# Altium PCB New BuckPCB.PcbDoc
Units mil, origin at the board's own origin, x right, y up, seen from the top; angles counter-clockwise.
Board outline 1785 x 1885 mil, 2 copper layers (Top Layer, Bottom Layer); 13 components, 7 nets, 30 pads, 1 vias.
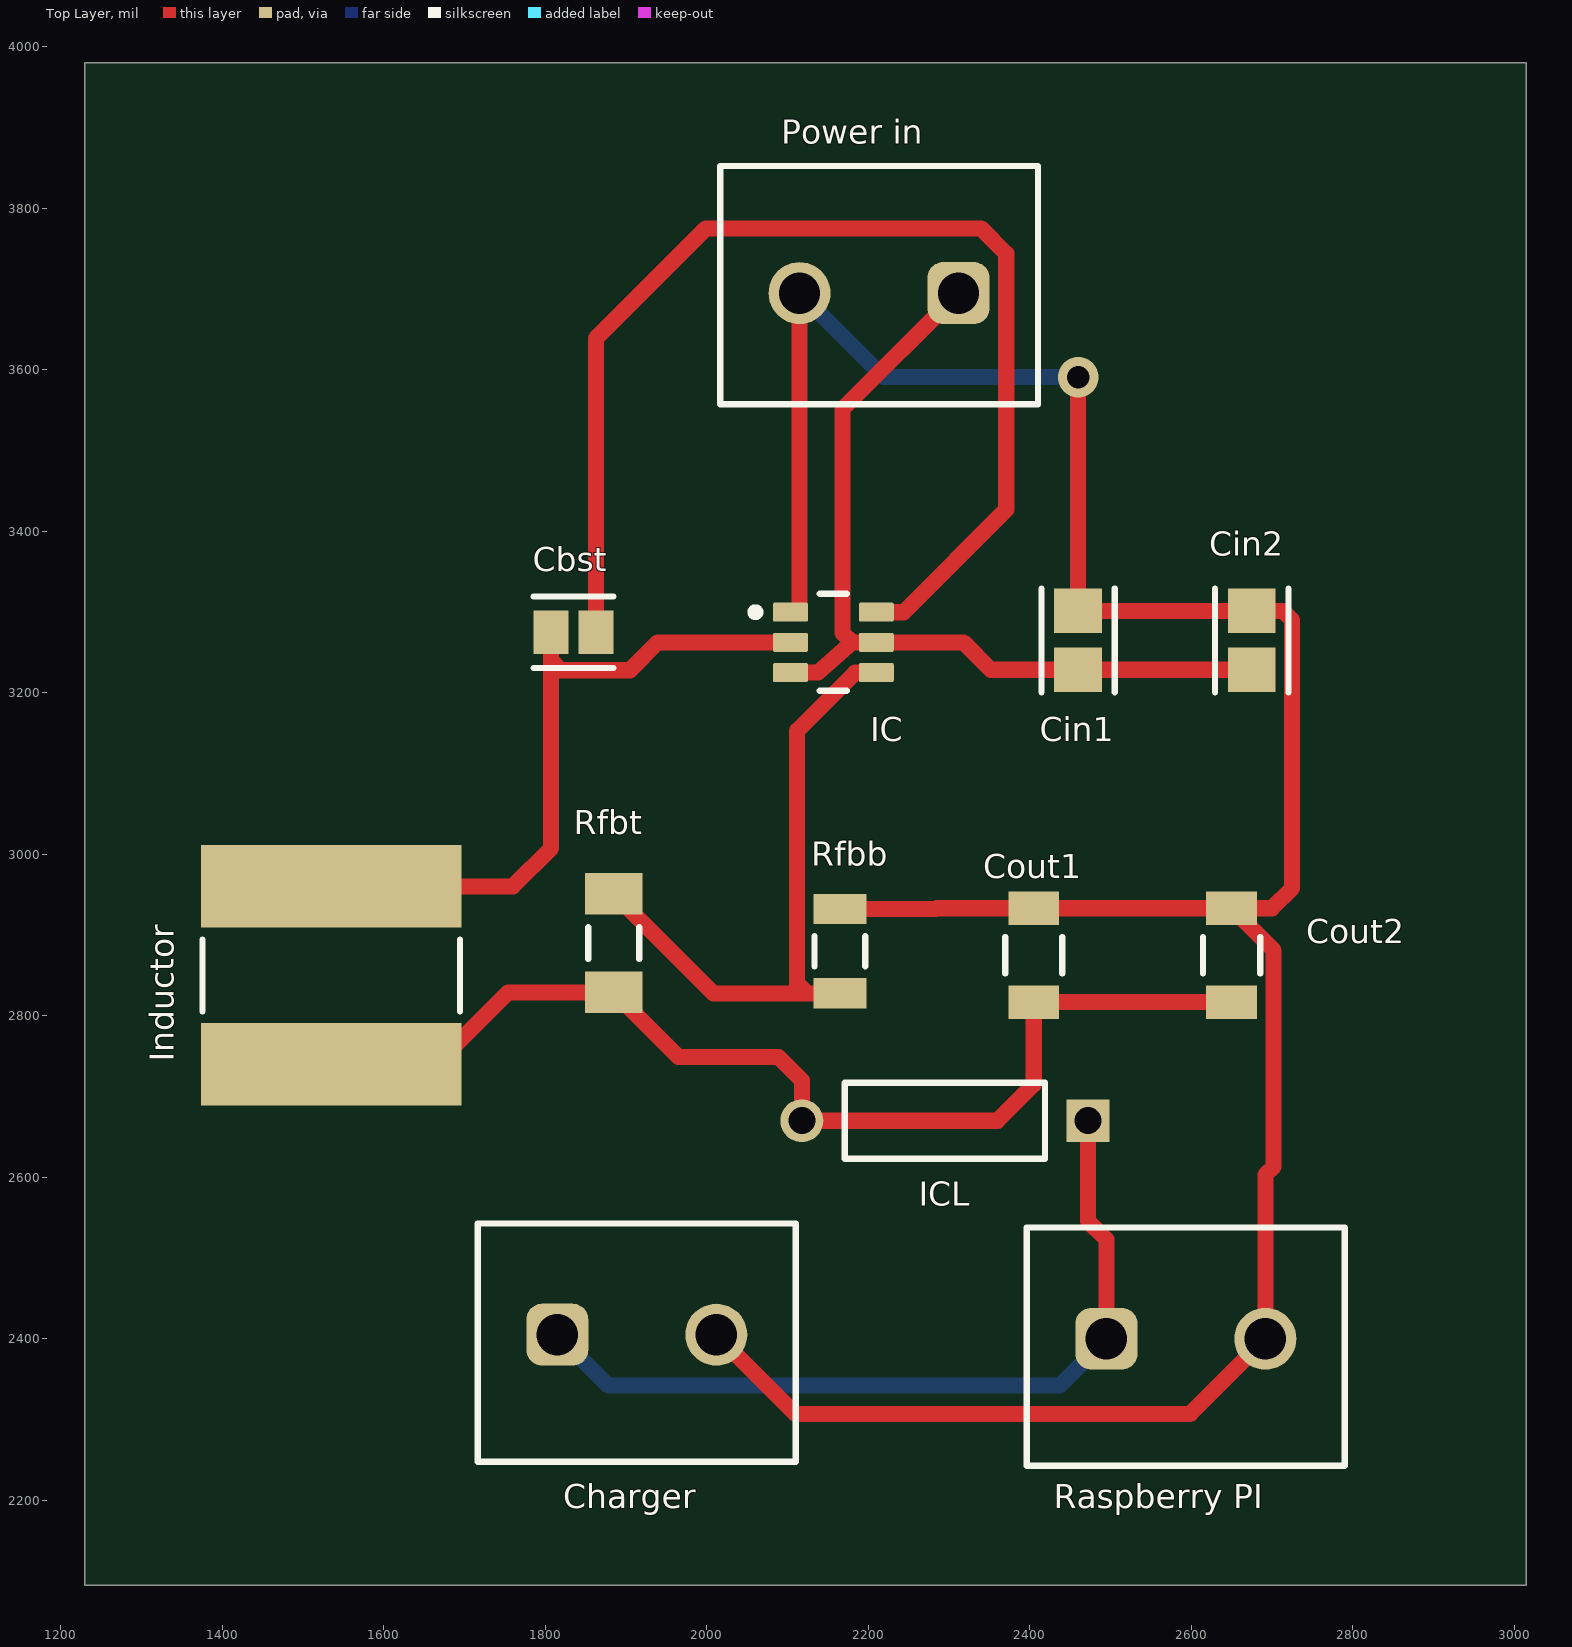
[diagram p0: Top Layer view]
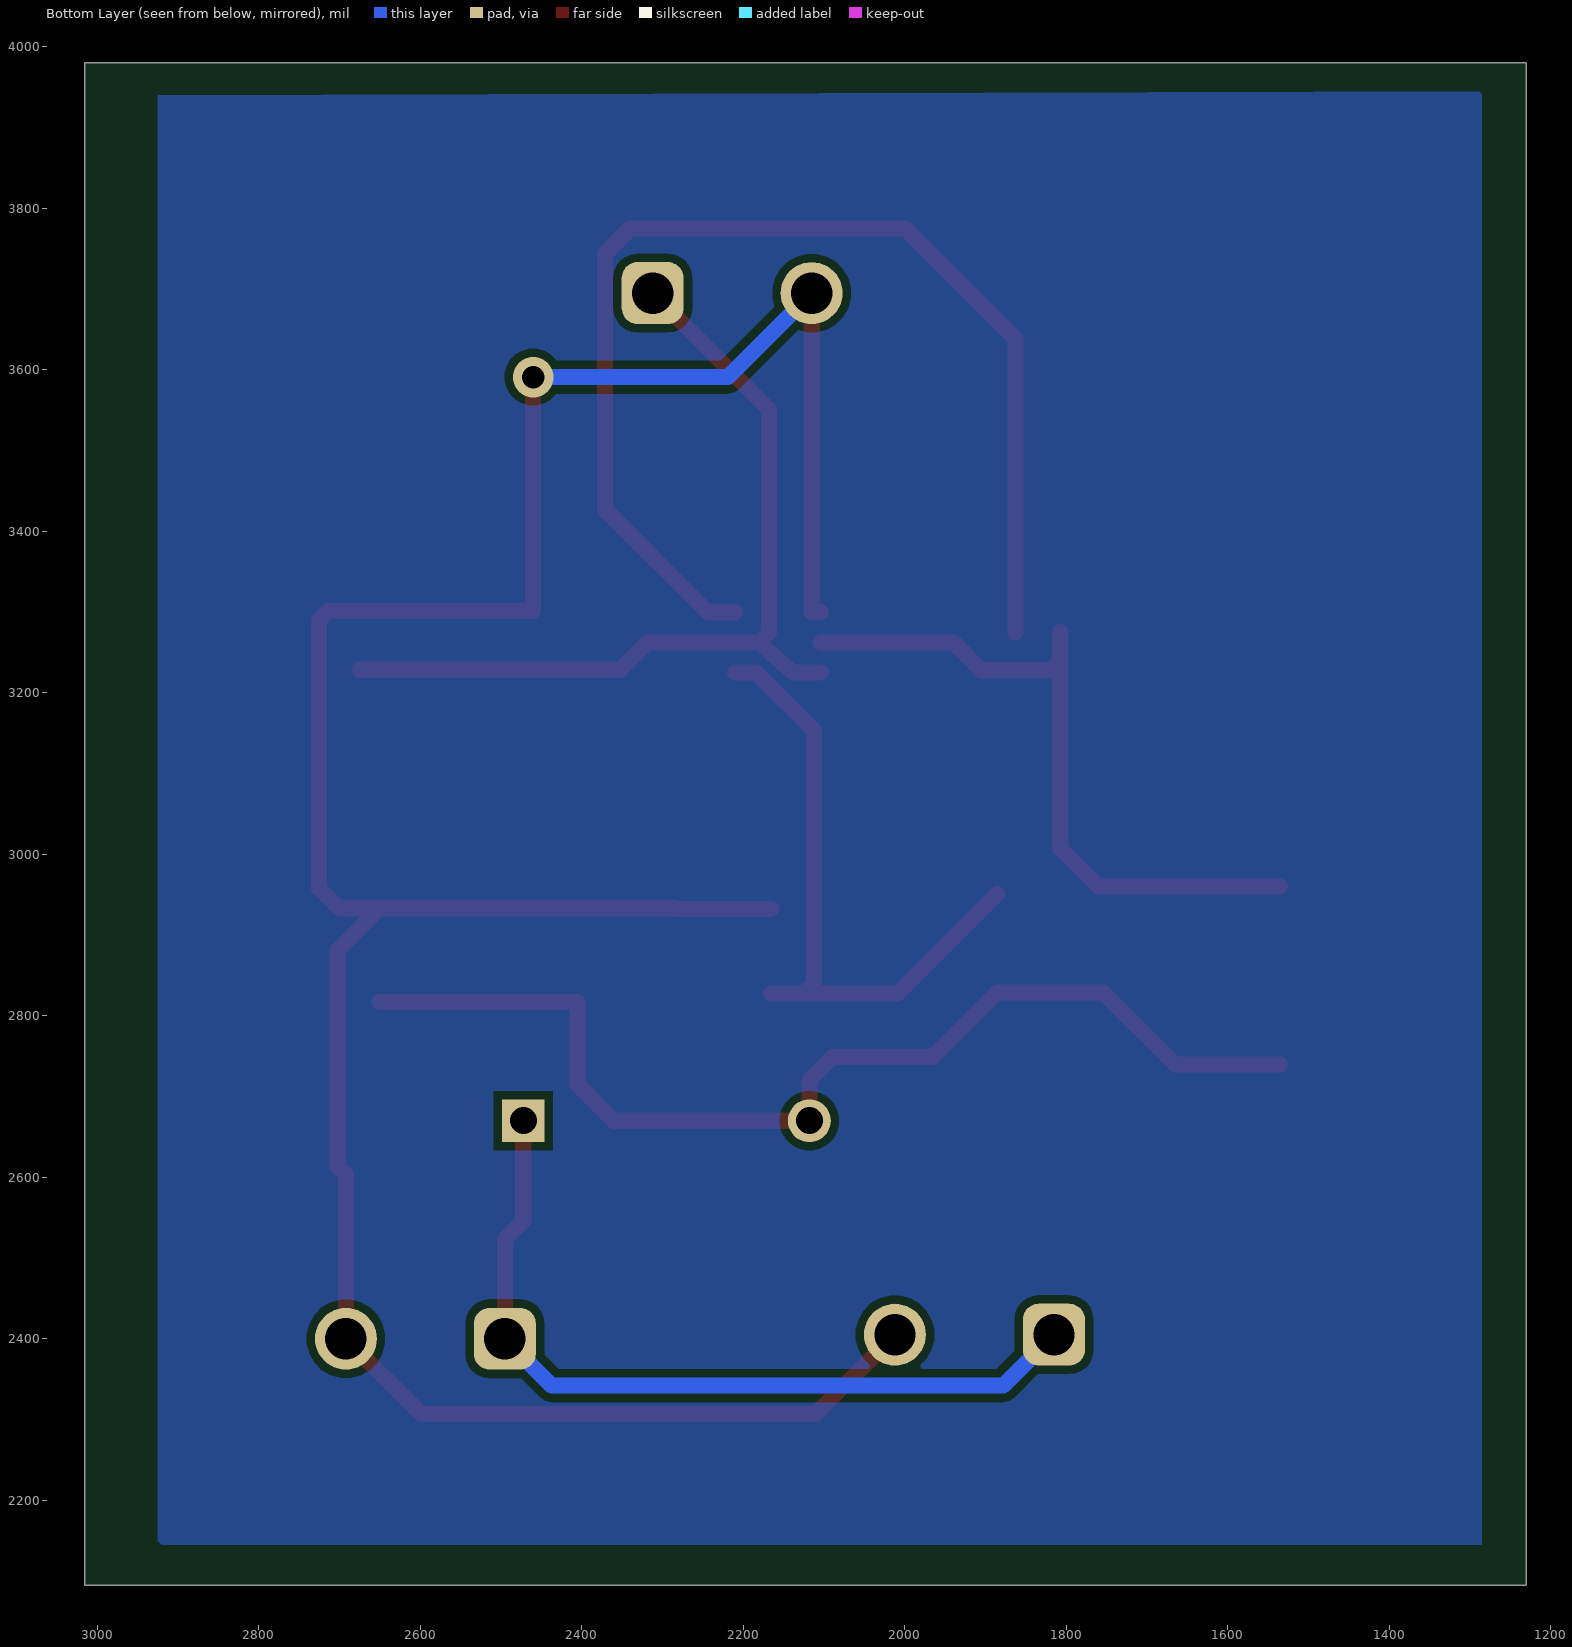
[diagram p1: Bottom Layer view, seen from below]
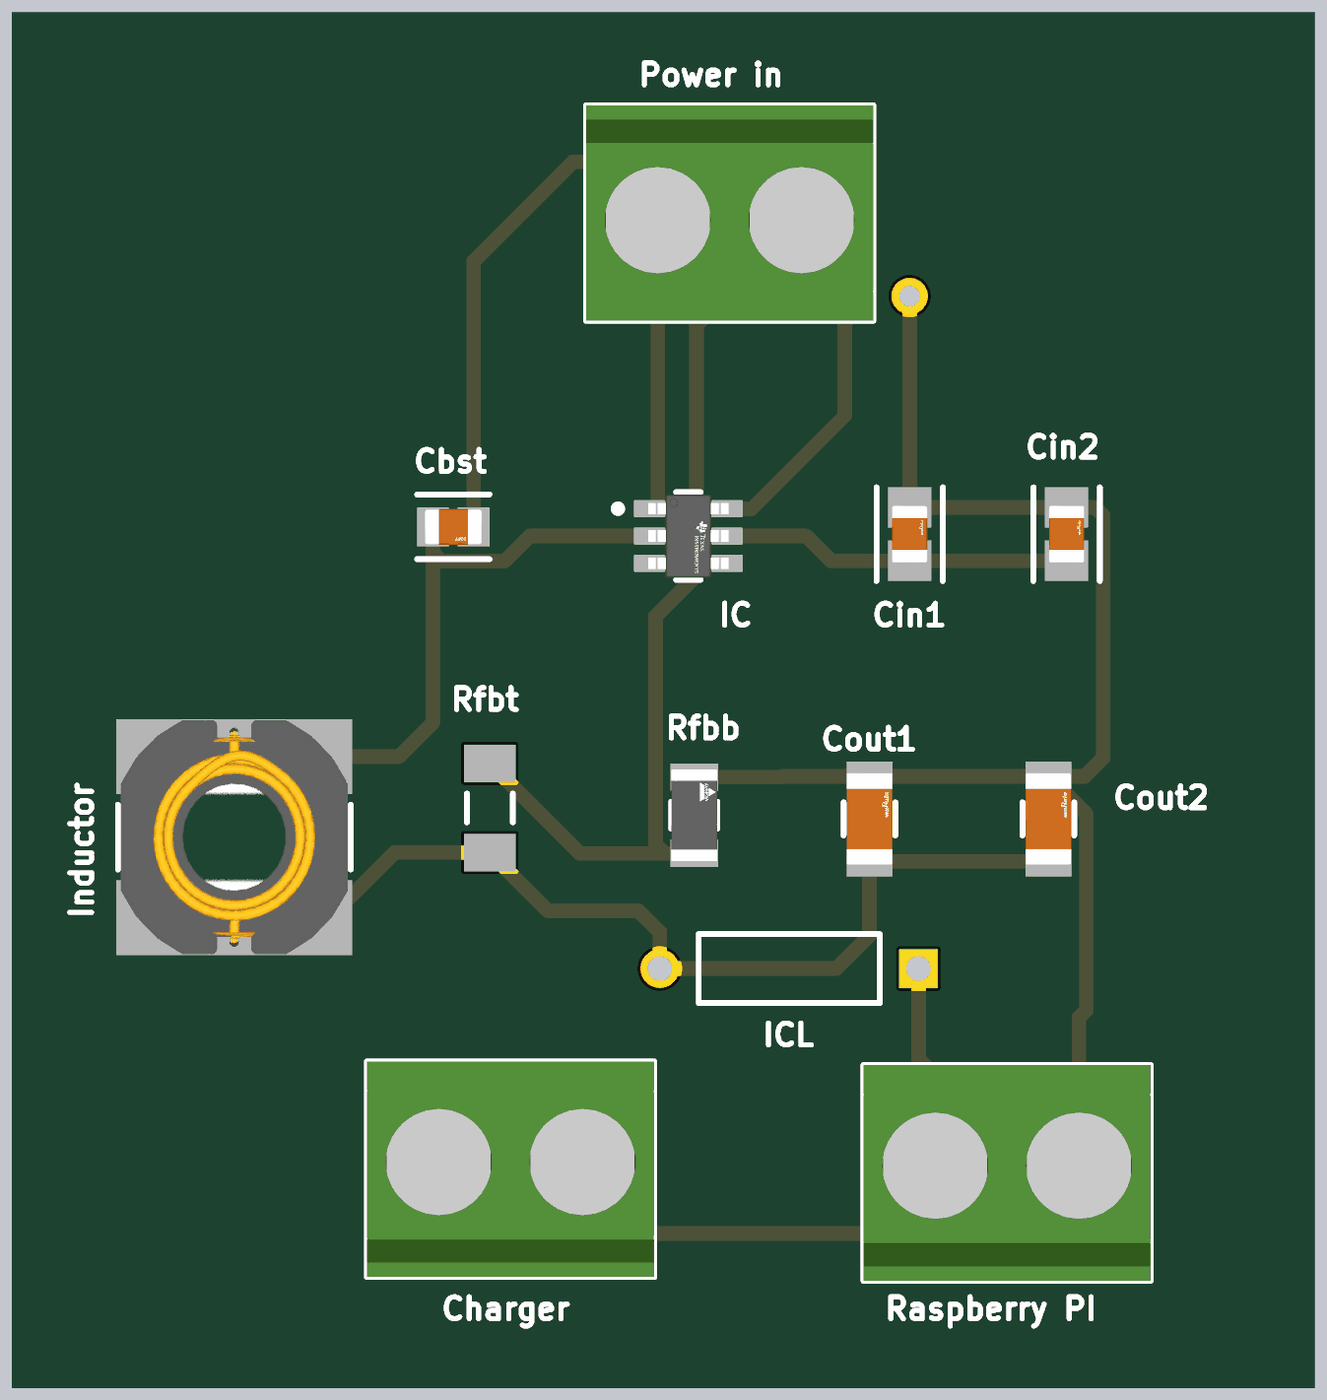
[diagram p2: 3D render of the assembled board from above, using the file's embedded part models]

## Layer stack, top to bottom
Top Solder: solder mask 0.4, Solder Resist, Dk 3.5
Top Layer: signal copper 1.4
Dielectric 1: dielectric 12.6, FR-4, Dk 4.8
Bottom Layer: signal copper 1.4
Bottom Solder: solder mask 0.4, Solder Resist, Dk 3.5

## Board outline
1230,2095 3015,2095 3015,3980 1230,3980

## Design rules (kind name [scope] priority, off if disabled: settings)
Clearance [All] p1: gap=10 ignorepadtopadclearanceinfootprint=FALSE
PolygonConnect [All] p1: connectstyle=Relief reliefconductorwidth=10 reliefentries=4 polygonreliefangle="90 Angle" airgapwidth=10
RoutingVias [All] p1: holewidth=28 width=50 viastyle="Through Hole" minholewidth=28 minwidth=50 maxholewidth=28 maxwidth=50
SolderMaskExpansion [All] p1: expansion=4 istentingtop=FALSE
SupplyNets "Schematic Supply Nets" [InNet('GND')] p1: voltage=0.000
Width [All] p1: maxlimit=50 minlimit=10 preferedwidth=20
30 further rules are at their usual default settings.

## Components (designator, comment, footprint, x,y, rotation, side; value= is the part's Value field where it differs from the comment)
Cbst "08053C104KAT2A" FP-0805-L_2_01_0_2-W_1_25-IPC_C 1835,3275 r0 top
Charger "691137710002" 691137710002 2593.43,2390.16 r0 top
Cin1 "GRM21BR61E106MA73L" FP-GRM21B-0_15-IPC_A 2460,3265 r90 top
Cin2 "GRM21BR61E106MA73L" FP-GRM21B-0_15-IPC_A 2675,3265 r90 top
Cout1 "GRM31CR71A226KE15L" FP-GRM31C-0_2-e0_3_0_8-MFG 2405,2875 r90 top
Cout2 "GRM31CR71A226KE15L" FP-GRM31C-0_2-e0_3_0_8-MFG 2650,2875 r90 top
IC "TPS563200DDCR" FP-DDC0006A-MFG 2156.85,3262.4 r0 top (schematic designator U?)
ICL "MFR-25FBF5210K" RESA60-630X240 2295,2670 r180 top
Inductor "SRN8040-3R3Y" FP-SRN8040-MFG 1535,2850 r270 top
"Power in" "691137710002" 691137710002 2213.43,3704.84 r180 top
"Raspberry PI" "691137710002" 691137710002 1913.43,2395.16 r0 top
Rfbb "CRCW120610K0FKEA" FP-CRCW1206-e3-IPC_C 2165,2880 r90 top
Rfbt "CRCW120656K2FKEA" RESC3216X60X45ML10T20 1885,2890 r90 top

## Footprints (in the part's own frame and the unit in brackets; to place one, negate y for a bottom-side part, rotate by r counter-clockwise, add the part's x,y. Pads: shape width x height; smd on the part's side, far side on the other; paste and mask are expansions set on the pad)
691137710002 [mm] "Horizontal Cable Entry with Pressure Clamp, pitch 5mm, 02p"
  rrect50% 1.95x1.95 hole 1.3: 1(-2.5,0.25)
  round 1.95 hole 1.3: 2(2.5,0.25)
  silkscreen extent -5,-3.75 5,3.75, body extent -5,-3.75 5,3.75, height 11.6
FP-0805-L_2_01_0_2-W_1_25-IPC_C [mil]
  rect 43.49x53.39 smd paste+0 mask+0: 1(-27.79,0) 2(27.79,0)
  silkscreen extent -50,-44 50,44, body extent -53,-32 53,32, height 10
FP-CRCW1206-e3-IPC_C [mil]
  rect 37.64x65.28 smd paste+0 mask+0: 1(-52.21,0) 2(52.21,0)
  silkscreen extent -19,-31 19,31, body extent -75,-38 75,38, height 10
FP-DDC0006A-MFG [mm]
  rrect17% 1.1x0.6 smd paste+0 mask+0: 1(-1.35,0.95) 2(-1.35,0) 3(-1.35,-0.95) 4(1.35,-0.95) 5(1.35,0) 6(1.35,0.95)
  silkscreen extent -2.57,-1.53 0.42,1.53, body extent -2,-1.63 2,1.63, height 0.25
FP-GRM21B-0_15-IPC_A [mil]
  rect 55.34x59.38 smd paste+0 mask+0: 1(-36.47,0) 2(36.47,0)
  silkscreen extent -64,-45 64,45, body extent -84,-49 84,49, height 10
FP-GRM31C-0_2-e0_3_0_8-MFG [mm]
  rect 1.05x1.6 smd paste+0 mask+0: 1(-1.475,0) 2(1.475,0)
  silkscreen extent -0.58,-0.9 0.58,0.9, body extent -2.1,-1 2.1,1, height 0.25
FP-SRN8040-MFG [mm]
  rect 2.6x8.2 smd paste+0 mask+0: 1(-2.8,0) 2(2.8,0)
  silkscreen extent -1.13,-4.05 1.13,4.05, body extent -4.27,-4.2 4.27,4.2, height 0.25
RESA60-630X240 [mm] "Axial Resistor, 2-Leads, Dia 2.4mm, Body Length 6.3mm"
  rect 1.35x1.35 hole 0.85: 1(-4.5,0)
  round 1.35 hole 0.85: 2(4.5,0)
  silkscreen extent -3.15,-1.2 3.15,1.2, body extent -3.15,-1.2 3.15,1.2, height 2.4
RESC3216X60X45ML10T20 [mm] "Chip Resistor, 2-Leads, Body 3.20x1.60mm, IPC Low Density"
  rect 1.3x1.8 smd: 1(-1.55,0) 2(1.55,0)
  silkscreen extent -0.5,-0.8 0.5,0.8, body extent -1.65,-0.85 1.65,0.85, height 0.6

## Part data
Cbst: library part CMP-2000-05014-2, "General Purpose Ceramic Capacitor, 0805, 100nF, 10%, X7R, 0.15, 25V", Capacitance=100nF, Case Code (Imperial)=0805, Case Code (Metric)=2012, Dielectric=X7R, Insulation Resistance=100GR, Max Operating Temperature=125°C, Min Operating Temperature=-55°C, Package Quantity=1, Tolerance=10%, Voltage=25V, Case/Package=0805, Construction=Flat, Contact Plating=Tin, Depth=1.25mm, Dissipation Factor=3%, Height=0.94mm, Lead Free="Lead Free", Length=2.01mm, Mount="Surface Mount", Number of Pins=2, Packaging="Tape and Reel", Radiation Hardening=No, REACH SVHC="No SVHC", RoHS Compliant=Yes, Series=-, Termination=SMD/SMT, Thickness=0.037inch, Voltage Rating=25V, Voltage Rating (DC)=25V, Width=0.049inch
Charger "Power in" "Raspberry PI": library part CMP-1502-03324-2, Current Rating=16A, Max Operating Temperature=120°C, Min Operating Temperature=-30°C, Voltage Rating=300V, Contact Material="Nickel, Tin", Height=11.6mm, Lead Pitch=5mm, NexarPartId=78871135, Number of Contacts=2, Number of Pins=2, Number of Rows=1, Packaging=Box, RoHS=Non-Compliant
Cin1 Cin2: library part CMP-06035-013048-1, "Chip Multilayer Ceramic Capacitors for General Purpose, 0805, 10uF, X5R, 15%, 20%, 25V", Capacitance=10uF, Case Code (Imperial)=0805, Case Code (Metric)=2012, Dielectric=X5R, Max Operating Temperature=85°C, Min Operating Temperature=-55°C, Package Quantity=3000, Resistor Type=Ceramic, Tolerance=20%, Voltage Rating=25V, Case/Package=0805, Depth=1.25mm, Height=1.25mm, Lead Free="Lead Free", Length=2mm, Mount="Surface Mount", Packaging="Tape and Reel", REACH SVHC="No SVHC", Termination=SMD/SMT, Thickness=0.055inch, Voltage Rating (DC)=25V, Weight=0.000335oz, Width=0.049inch
Cout1 Cout2: library part CMP-06035-003841-1, "Chip Multilayer Ceramic Capacitors for General Purpose, 1206, 22uF, X7R, 15%, 10%, 10V", Capacitance=22uF, Case Code (Imperial)=1206, Case Code (Metric)=3216, Dielectric=X7R, Max Operating Temperature=125°C, Min Operating Temperature=-55°C, Package Quantity=1, Tolerance=10%, Voltage=10V, Case/Package=1206, Depth=1.6mm, Height=1.6mm, Lead Free="Lead Free", Length=3.2mm, Material=Ceramic, Mount="Surface Mount", Packaging="Tape and Reel", Radiation Hardening=No, REACH SVHC="No SVHC", Termination=SMD/SMT, Thickness=0.071inch, Voltage Rating=10V, Voltage Rating (DC)=10V, Width=0.063inch
IC: library part CMP-04918-000155-1, "IC REG BUCK ADJ 3A TSOT23-6", Case/Package=SOT-23-6, Max Input Voltage=17V, Max Operating Temperature=125°C, Max Output Current=3A, Max Output Voltage=7V, Min Input Voltage=4.5V, Min Operating Temperature=-40°C, Min Output Voltage=760mV, Quiescent Current=190uA, Switching Frequency=650kHz, Contact Plating=Tin, Lead Free="Lead Free", Mount="Surface Mount", Number of Outputs=1, Operating Supply Voltage=17V, Output Configuration=Positive, Output Current=3A, Output Type=Adjustable, Output Voltage=7V, Packaging="Tape and Reel", Radiation Hardening=No, Synchronous Rectifier=Yes
ICL: library part CMP-1659-00074-2, "Axial Resistor, 10 KOhm, +/- 1%, 0.25 W, -55 to 155 degC, 2-Pin THD, RoHS, Bulk", Case\/Package=Axial, Manufacturer=Yageo, Max Operating Temperature=155degC, Max Power Dissipation=250mW, Min Operating Temperature=-55degC, Package Description="2-Pin Axial Lead, Dia 2.4 mm, Body Length 6.3 mm", Package Quantity=200, Package Reference=MFR-25, Resistance=10KOhm, Temperature Coefficient=100ppm\/degreesC, Tolerance=1%, Voltage Rating=250V, Voltage Rating (DC)=200V, Composition=MetalFilm, Datasheet URL=http://www.yageo.com/documents/recent/Yageo%20LR_MFR_2013.pdf, Datasheet Version=04/2013, Lead Free=LeadFree, Length=0.248inch, Manufacturer URL=http://www.yageo.com/, Military Standard=Not, Mount=ThroughHole, Mounting Technology=ThroughHole, Number of Terminations=2, Packaging=Bulk, Power Rating=250mW, RoHSCompliant=True, Termination=Axial
Inductor: library part CMP-07248-000074-1, "FIXED IND 3.3UH 5.6A 21 MOHM SMD", Case/Package=Nonstandard, Current Rating=5.6A, DC Resistance (DCR)=21mR, Inductance=3.3uH, Inductance Tolerance=30%, Max Operating Temperature=125°C, Min Operating Temperature=-40°C, Package Quantity=1000, Resistor Type=Wirewound, Saturation Current=5.5A, Self Resonant Frequency=34MHz, Test Frequency=100kHz, Core Material=Ferrite, DC Current=5.6A, Depth=8.3mm, Height=4mm, Height - Seated (Max)=0.157inch, Length=8mm, Material=Steel, Max DC Current=5.6A, Military Standard=Not, Mount="Surface Mount", Number of Pins=2, Packaging="Tape and Reel", REACH SVHC="No SVHC", RMS Current (Irms)=5.6A, RoHS Compliant=Yes, Sample Rate (Hz)=100kHz, Series=SRN8040, Shielding=Shielded, Termination=SMD/SMT, Tolerance=30%, Width=8mm
Rfbb: library part CMP-2003-04807-2, "RES Thick Film, 10kΩ, 1%, 0.25W, 100ppm/°C, 1206", Case Code (Imperial)=1206, Case Code (Metric)=3216, Max Operating Temperature=155°C, Max Power Dissipation=250mW, Min Operating Temperature=-55°C, Package Quantity=10, Resistance=10kR, Temperature Coefficient=100ppm/°C, Tolerance=1%, Voltage Rating=200V, Case/Package=1206, Composition="Thick Film", Contact Plating=Tin, Depth=1.6mm, Features="Automotive AEC-Q200", Height=0.55mm, Lead Free="Lead Free", Length=3.2mm, Military Standard=Not, Number of Pins=2, Number of Terminations=2, Packaging="Tape and Reel", Power Rating=250mW, Radiation Hardening=No, Termination=SMD/SMT, Voltage Rating (DC)=200V, Weight=0.000353oz, Width=0.063inch, Working Voltage=200V
Rfbt: library part CMP-2003-02284-1, Manufacturer="Vishay Dale", Part Number=CRCW120656K2FKEA

## Via types
v1: diameter 50, hole 28, Top Layer to Bottom Layer, 1 vias

## Nets (pads, with @x,y where several pads share a name; then routed paths per layer and width w, separated by ;. In a path a pad name is that pad's centre, name@x,y a point inside that pad or via, vN(x,y) a via of type N, cw(c..) or ccw(c..) an arc to the next point about the centre after c; other vN are vias at no path point)
GND: "Power in.2" "Raspberry PI.2" Charger.2 Cin1.2 Cin2.2 Cout1.2 Cout2.2 IC.1 Rfbb.2 | length 3574.4
  Top Layer w20: 2011.85,2405 2109.85,2307 2598.85,2307 Charger.2 2691.85,2602.85 2702,2613 2702,2881.07 Cout2.2 ; IC.1 2115,3299.8 2115,3695 ; Rfbb.2 2284,2932.21 2284.86,2933.07 Cout1.2 Cout2.2 ; v1(2460,3591) Cin1.2 Cin2.2 2713.53,3301.47 2725,3290 2725,2958.07 2700,2933.07 Cout2.2
  Bottom Layer w20: 2115,3695 2219,3591 v1(2460,3591)
NetCbst_1: Cbst.1 IC.2 Inductor.1 | length 875
  Top Layer w20: Inductor.1 1760,2960.24 1807.21,3007.45 1807.21,3240 ; Cbst.1 1807.21,3240 ; IC.2 1939.4,3262.4 1905,3228 1819.21,3228 1807.21,3240
NetCbst_2: Cbst.2 IC.6 | length 1471.9
  Top Layer w20: Cbst.2 1862.79,3638.79 1999,3775 2340,3775 2371,3744 2371,3427 2243.8,3299.8 IC.6
NetCin1_1: "Power in.1" Cin1.1 Cin2.1 IC.3 IC.5 | length 1096.7
  Top Layer w20: IC.3 2138,3225 2180,3262.4 ; 2311.85,3695 2168,3551.15 2168,3274.4 2180,3262.4 ; Cin2.1 Cin1.1 2351.87,3228.53 2318,3262.4 IC.5 2180,3262.4
NetCout1_1: Cout1.1 Cout2.1 ICL.2 Inductor.2 Rfbt.1 | length 1367.7
  Top Layer w20: Inductor.2 1665,2739.76 1754.21,2828.98 Rfbt.1 1964.98,2749 2088.83,2749 2117.83,2720 ICL.2 2360,2670 2405,2715 Cout1.1 Cout2.1
NetRfbb_1: IC.4 Rfbb.1 Rfbt.2 | length 789.1
  Top Layer w20: Rfbt.2 2008.23,2827.79 2124.21,2827.79 ; Rfbb.1 2124.21,2827.79 ; IC.4 2184,3225 2112,3153 2112,2840 2124.21,2827.79
Vout: "Raspberry PI.1" Charger.1 ICL.1 | length 1009.6
  Top Layer w20: ICL.1 2472.17,2545.83 2495,2523 Charger.1
  Bottom Layer w20: 1815,2405 1878,2342 2437,2342 Charger.1

## Polygon pours and split planes (outlines as drawn)
no net on Bottom Layer "NONET_L-01_P-001" (solid, pour order 0): 1285,3945 1285,2145 2920,2145 2925,2150 2925,3940